# EAGLE board ad5272_arduino_ethernet_3 (EAGLE 8.1.1)
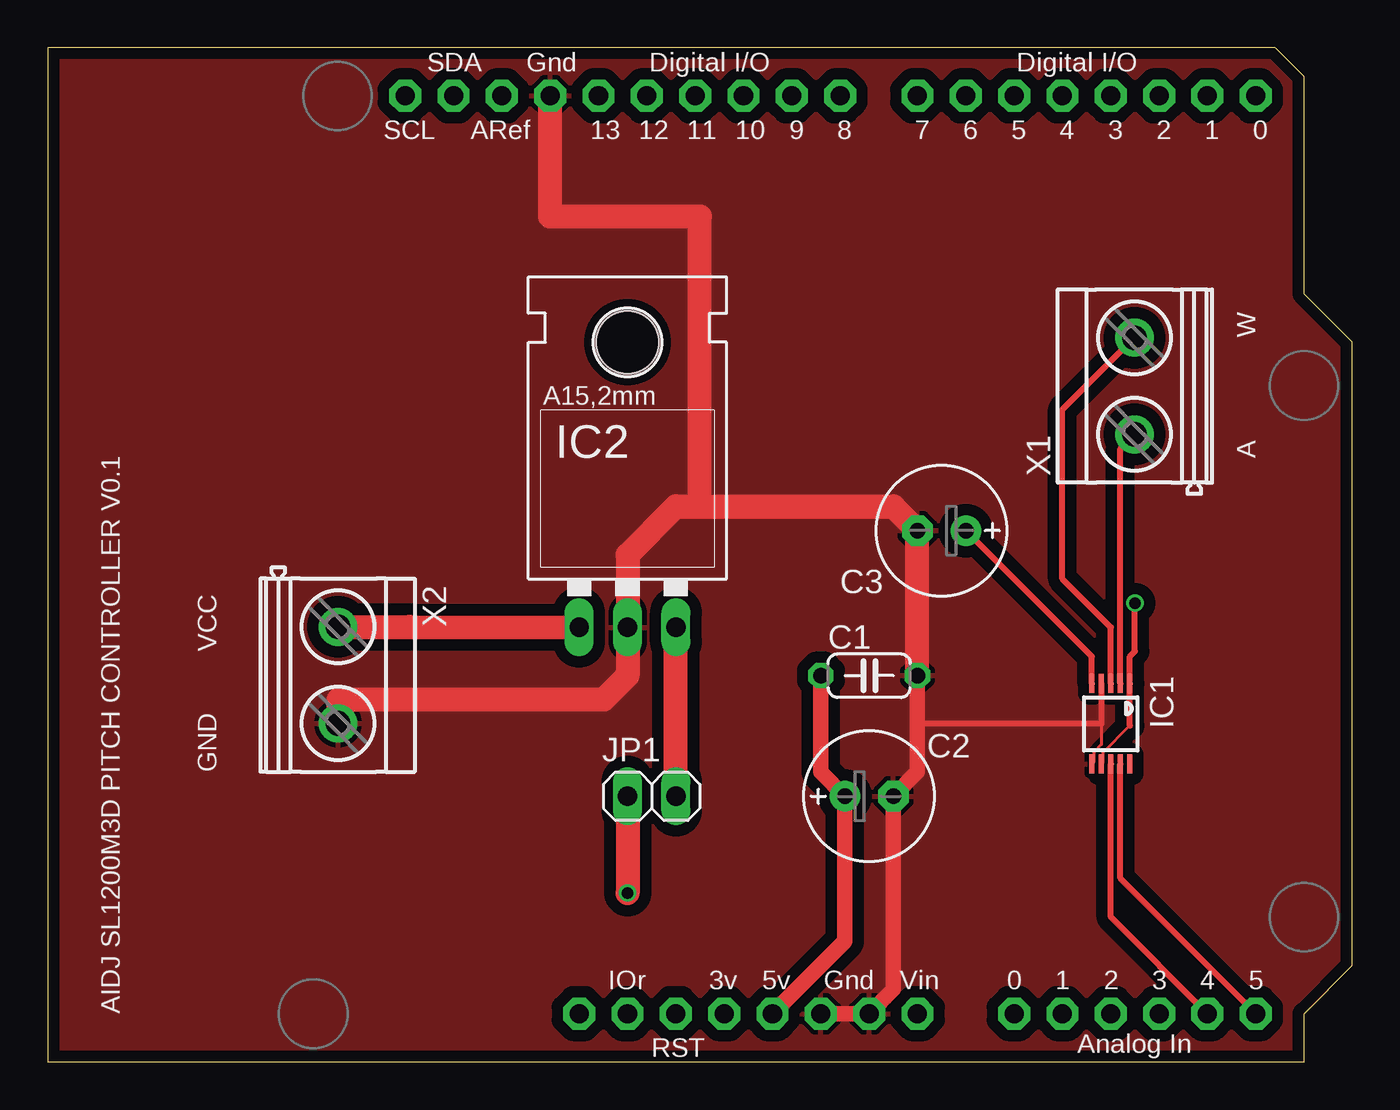
[diagram p0: board, top side]
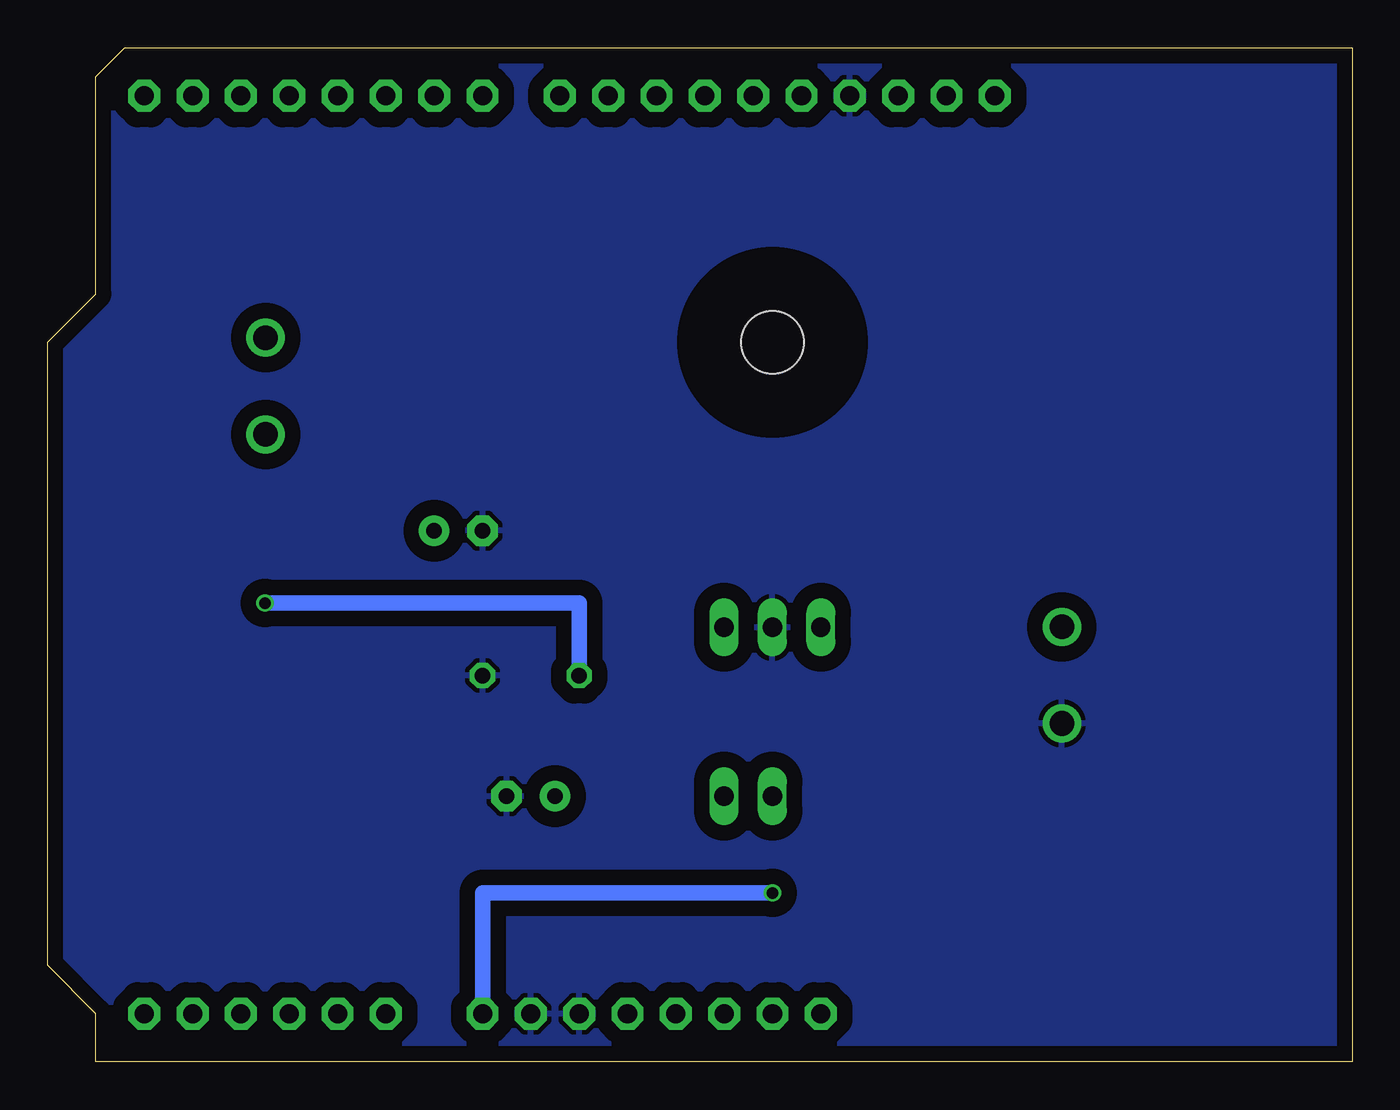
[diagram p1: board, bottom side, seen from below]

Size 68.58 x 53.34 mm. Coordinates in mm from the lower left corner, seen from the top.
Copper layers (1*16): Top 0.035mm / dielectric 1.5mm / Bottom 0.035mm
Design rules "ssci_SeeedStudio_2layer_DRU_no_angle": minimum track width 6mil, minimum drill 12mil, track to track 6mil, track to pad 6mil, pad to pad 6mil, via to via 6mil, smd to smd 0mil, copper to edge 10mil, drill to drill 10mil, minimum pad ring 10mil, minimum via ring 6mil, stop-mask expansion 2mil, vias tented up to drill 25mil, thermal gap 10mil

## Footprints (pad centres in the part's own frame; a part is rotated, then mirrored left to right if it is on the bottom)
C050-024X044 = drill 0.813 octagon: 1 -2.54,0; 2 2.54,0
E2,5-7 = drill 0.813 pad 1.6: + -1.27,0 | drill 0.813 pad 1.6 octagon: - 1.27,0
MSOP10 = smd 0.25 x 1: 1 -1,-2.113; 2 -0.5,-2.113; 3 0,-2.113; 4 0.5,-2.113; 5 1,-2.113; 6 1,2.113; 7 0.5,2.113; 8 0,2.113; 9 -0.5,2.113; 10 -1,2.113
78XXL = drill 1.016 long: GND 0,-3.81; IN -2.54,-3.81; OUT 2.54,-3.81 | hole 3.302: 0,11.176
1X02 = drill 1.016 long: 1 -1.27,0; 2 1.27,0
ARDUINOR3 = drill 1 pad 1.676 octagon: 3V 35.56,2.54; 5V 38.1,2.54; A0 50.8,2.54; A1 53.34,2.54; A2 55.88,2.54; A3 58.42,2.54; A4 60.96,2.54; A5 63.5,2.54; AREF 23.876,50.8; D0 63.5,50.8; D1 60.96,50.8; D2 58.42,50.8; D3 55.88,50.8; D4 53.34,50.8; D5 50.8,50.8; D6 48.26,50.8; D7 45.72,50.8; D8 41.656,50.8; D9 39.116,50.8; D10 36.576,50.8; D11 34.036,50.8; D12 31.496,50.8; D13 28.956,50.8; GND 26.416,50.8; GND1 43.18,2.54; GND2 40.64,2.54; IOREF 30.48,2.54; RESERVED 27.94,2.54; RESET 33.02,2.54; SCL 18.796,50.8; SDA 21.336,50.8; VIN 45.72,2.54
MKDSN1,5/2-5,08 = drill 1.3 pad 2: 1 -2.561,0.025; 2 2.519,0.025

## Placement (x,y rotation side)
C1  [C050-024X044]  43.18,20.32 0 top
C2  [E2,5-7]  43.18,13.97 0 top
C3  [E2,5-7]  46.99,27.94 180 top
IC1  AD5272  [MSOP10]  55.88,17.78 180 top
IC2  [78XXL]  30.48,26.67 0 top
JP1  [1X02]  31.75,13.97 0 top
U1  ARDUINOR3-DIMENSION  [ARDUINOR3]  0,0 0 top
X1  MKDSN1,5/2-5,08  [MKDSN1,5/2-5,08]  57.15,35.56 90 top
X2  MKDSN1,5/2-5,08  [MKDSN1,5/2-5,08]  15.24,20.32 270 top

## Library data of the parts
C1-C3 = rcl
IC1 = aidj; MPN: AD7992BRMZ-0; OC_FARNELL: 1078311; OC_NEWARK: 31M4422
IC2 = v-reg
JP1 = pinhead
U1 = adafruit
X1 X2 = con-phoenix-508; MPN: MKDSN 1,5/2-5.08; OC_FARNELL: 1792903; OC_NEWARK: 30M2397

## Nets
3V: U1.3V
GND: C1.2 C2.- C3.- IC1.4 IC1.6 IC2.GND U1.GND U1.GND1 U1.GND2 X2.2
N$1: IC1.9 U1.A5
N$2: IC1.8 U1.A4
N$3: IC2.OUT JP1.2
N$4: C3.+ IC1.5
N$5: C1.1 C2.+ IC1.1 IC1.7 U1.5V
N$6: IC1.3 X1.2
N$7: IC1.2 X1.1
N$8: JP1.1 U1.VIN
VCC: IC2.IN X2.1

## Tracks (layer width: path | path; a pad name or v marks a point on that pad's centre or on a via)
GND
  Top 0.152: 55.38,17.78 55.38,16.69 54.98,16.29 54.98,15.76 IC1.6
  Top 0.305: IC1.4 55.38,17.78 45.72,17.78
  Top 0.813: U1.GND2 U1.GND1 44.45,3.81 C2.- 45.72,15.24 45.72,17.78 C1.2
  Top 1.27: C1.2 C3.- 44.45,29.21 34.29,29.21 | X2.2 15.29,19.05 29.21,19.05 30.48,20.32 IC2.GND 30.48,26.67 33.02,29.21 34.29,29.21 | 34.29,29.21 34.29,44.45 26.42,44.45 U1.GND
  pour Top (isolate 0.61): 0,53.34 64.77,53.34 66.04,52.07 66.04,40.64 68.58,38.1 68.58,5.08 66.04,2.54 66.04,0 0,0
  pour Bottom (isolate 0.813): 0,53.34 64.77,53.34 66.04,52.07 66.04,40.64 68.58,38.1 68.58,5.08 66.04,2.54 66.04,0 0,0
N$1
  Top 0.305: U1.A5 56.38,9.66 IC1.9
N$2
  Top 0.305: U1.A4 55.88,7.62 IC1.8
N$3
  Top 1.27: JP1.2 IC2.OUT
N$4
  Top 0.305: IC1.5 54.88,21.32 C3.+
N$5  (via drill 0.6 pad 0.41)
  Top 0.152: IC1.7 55.48,15.76 55.48,16.28 56.88,17.69
  Top 0.305: 56.88,17.69 IC1.1 56.88,21.32 57.15,21.59 v57.15,24.13
  Top 0.813: C1.1 40.64,15.24 C2.+ 41.91,6.35 U1.5V
  Bottom 0.813: v57.15,24.13 40.64,24.13 C1.1
N$6
  Top 0.305: IC1.3 55.88,22.86 53.34,25.4 53.34,34.29 X1.2
N$7
  Top 0.305: IC1.2 56.38,32.25 X1.1
N$8  (via drill 0.6 pad 0.41)
  Top 1.27: JP1.1 v30.48,8.89
  Bottom 0.813: v30.48,8.89 45.72,8.89 U1.VIN
VCC
  Top 1.27: X2.1 19.03,22.88 IC2.IN

## Text on the board
_tsilk: W | A | VCC | GND | AIDJ SL1200M3D PITCH CONTROLLER V0.1